# Altium PCB PCB2.PcbDoc
Units mm, origin at the board's own origin, x right, y up, seen from the top; angles counter-clockwise.
Board outline 152.4 x 101.6 mm, 2 copper layers (Top Layer, Bottom Layer); 92 components, 79 nets, 413 pads, 0 vias.
Unrouted connection lines stored in the file: 235.
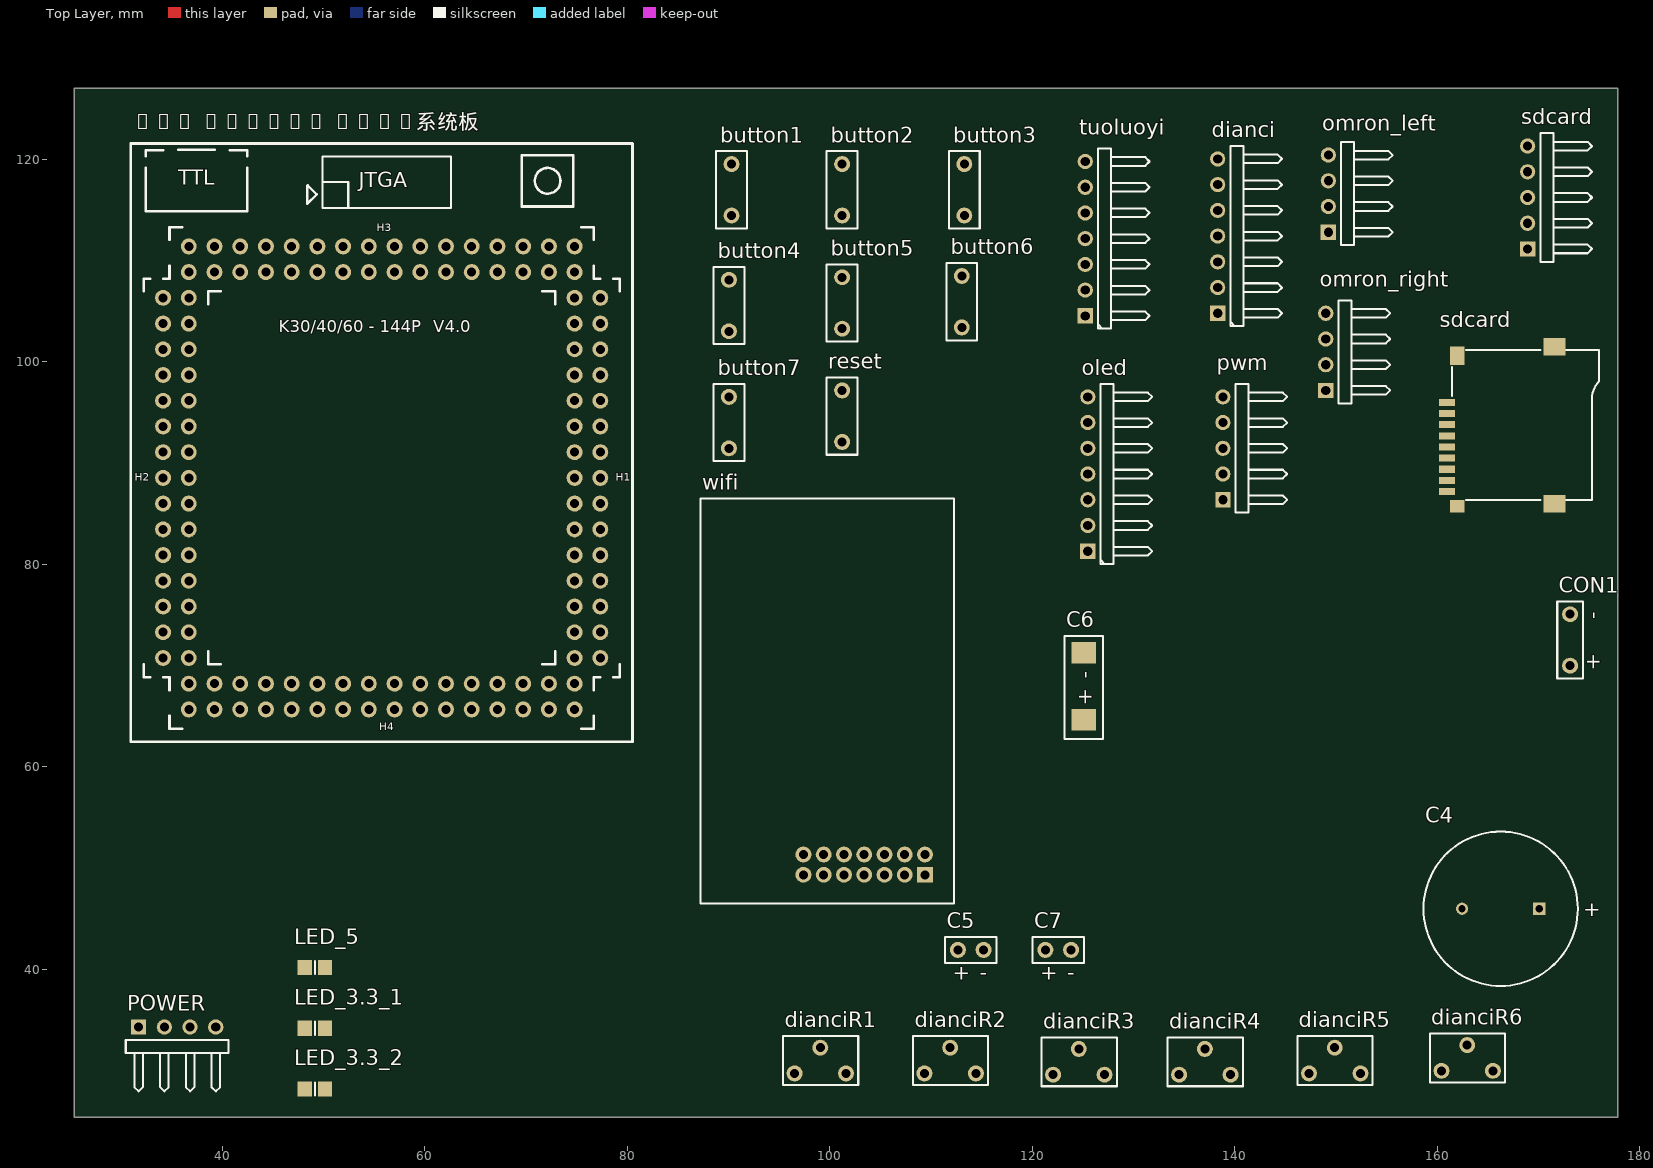
[diagram p0: Top Layer view]
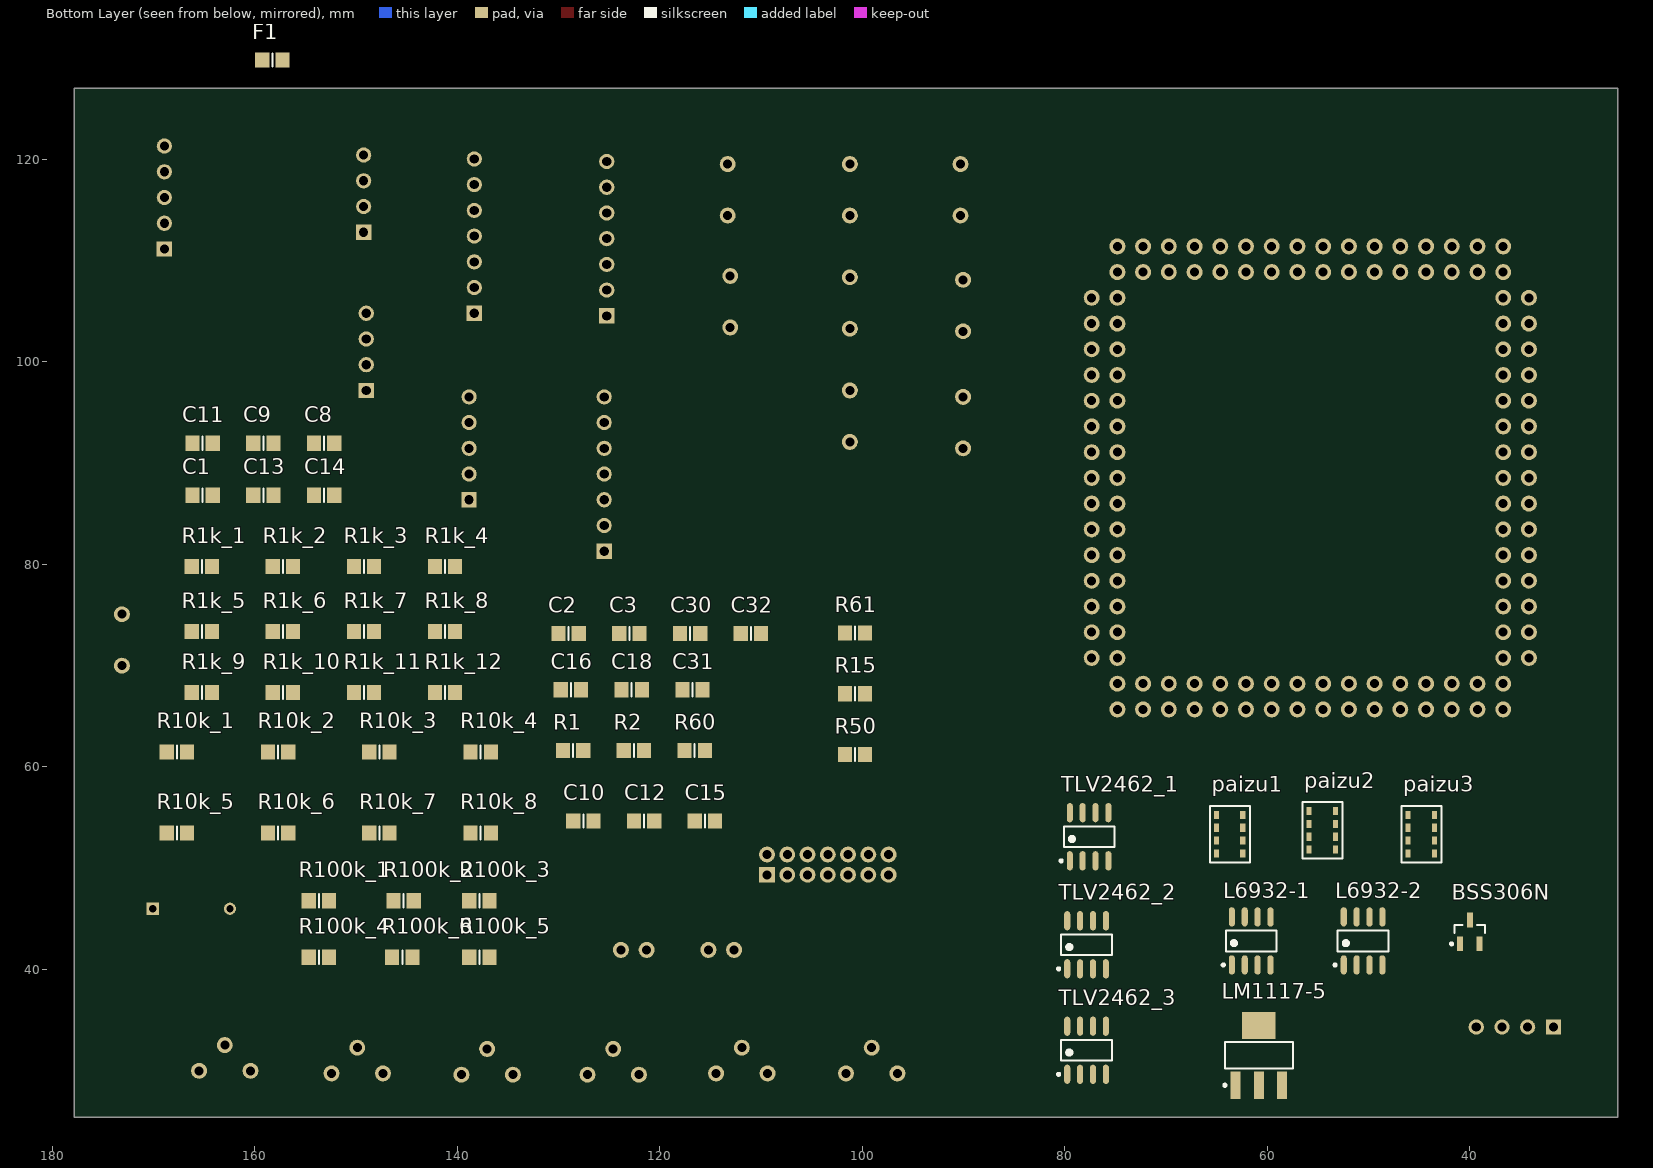
[diagram p1: Bottom Layer view, seen from below]

## Layer stack, top to bottom
Top Layer: signal copper 0.0356
Dielectric: dielectric 0.32, FR-4, Dk 4.8
Bottom Layer: signal copper 0.0356

## Board outline
25.4,25.4 177.8,25.4 177.8,127 25.4,127

## Design rules (kind name [scope] priority, off if disabled: settings)
Clearance [All] p1: gap=0.254
PolygonConnect [All] p1: connectstyle=Relief reliefconductorwidth=0.254 reliefentries=4 polygonreliefangle="90 Angle" airgapwidth=0.254
RoomDefinition control [InComponentClass('control')] p1: confinementstyle=ConfineIn formatcopy=TRUE lockcomponents=FALSE outline 0,0 50.8,0 50.8,25.4 0,25.4
RoutingVias [All] p1: holewidth=0.711 width=1.27 viastyle="Through Hole" minholewidth=0.711 minwidth=1.27 maxholewidth=0.711 maxwidth=1.27
SolderMaskExpansion [All] p1: expansion=0.102
Width [All] p1: maxlimit=0.254 minlimit=0.254 preferedwidth=0.254
28 further rules are at their usual default settings.

## Components (designator, comment, footprint, x,y, rotation, side; value= is the part's Value field where it differs from the comment)
BSS306N "MOSFET-N" SOT-23_M 40.005,43.688 r90 bottom
button1 "SW-PB" BUTTON 90.297,114.427 r90 top
button2 "SW-PB" BUTTON 101.219,114.427 r90 top
button3 "SW-PB" BUTTON 113.284,114.427 r90 top
button4 "SW-PB" BUTTON 90.043,102.997 r90 top
button5 "SW-PB" BUTTON 101.219,103.251 r90 top
button6 "SW-PB" BUTTON 113.03,103.378 r90 top
button7 "SW-PB" BUTTON 90.043,91.44 r90 top
C1 "Cap" 6-0805_M 165.129,86.803 r180 bottom
C2 "Cap" 6-0805_M 128.989,73.152 r180 bottom
C3 "Cap" 6-0805_M 122.989,73.152 r180 bottom
C4 "Cap Pol1" RB7.6-15 166.243,45.974 r0 top
C5 "Cap Pol1" 钽电容_小 112.649,41.91 r0 top
C6 "Cap Pol1" D7343 125.095,64.643 r90 top
C7 "Cap Pol1" 钽电容_小 121.285,41.91 r0 top
C8 "Cap" 6-0805_M 153.129,91.948 r180 bottom
C9 "Cap" 6-0805_M 159.129,91.948 r180 bottom
C10 "Cap" 6-0805_M 127.529,54.639 r180 bottom
C11 "Cap" 6-0805_M 165.129,91.948 r180 bottom
C12 "Cap" 6-0805_M 121.529,54.639 r180 bottom
C13 "Cap" 6-0805_M 159.129,86.803 r180 bottom
C14 "Cap" 6-0805_M 153.129,86.803 r180 bottom
C15 "Cap" 6-0805_M 115.529,54.639 r180 bottom
C16 "Cap" 6-0805_M 128.758,67.593 r180 bottom
C18 "Cap" 6-0805_M 122.758,67.593 r180 bottom
C30 "Cap" 6-0805_M 116.989,73.152 r180 bottom
C31 "Cap" 6-0805_M 116.758,67.593 r180 bottom
C32 "Cap" 6-0805_M 110.989,73.152 r180 bottom
CON1 "PowerIn" 接线端子 173.101,69.977 r90 top
dianci "interface_dianci" HDR1X7H 138.303,104.775 r90 top (schematic designator interface_dianci)
dianciR1 "R4" 滑动变阻器 99.06,32.258 r0 top
dianciR2 "R4" 滑动变阻器 111.887,32.258 r0 top
dianciR3 "R4" 滑动变阻器 124.587,32.131 r0 top
dianciR4 "R4" 滑动变阻器 137.033,32.131 r0 top
dianciR5 "R4" 滑动变阻器 149.86,32.258 r0 top
dianciR6 "R4" 滑动变阻器 162.941,32.512 r0 top
F1 "Fuse 2" 6-0805_M 158.242,129.794 r180 bottom
"K60 144PIN V4.0系统板" "U?" "K60 V4.0最小系统版" 55.753,88.646 r0 top
L6932-1 "L6932" L6932 61.595,42.799 r90 bottom
L6932-2 "L6932" L6932 50.546,42.799 r90 bottom
LED_3.3_1 "LED2" 6-0805_M 49.149,34.178 r0 top
LED_3.3_2 "LED2" 6-0805_M 49.149,28.178 r0 top
LED_5 "LED2" 6-0805_M 49.149,40.178 r0 top
LM1117-5 "LM1117-5" SOT223_M 60.833,31.496 r90 bottom
oled "oled" HDR1X7H 125.476,81.28 r90 top
omron_left "omron_encoder" HDR1X4H 149.225,112.776 r90 top (schematic designator omron_encoder_left)
omron_right "omron_encoder" HDR1X4H 148.971,97.155 r90 top (schematic designator omron_encoder_right)
paizu1 "paizu_1206" paizu 65.024,51.435 r90 bottom
paizu2 "paizu_1206" paizu 55.88,51.816 r90 bottom
paizu3 "paizu_1206" paizu 46.101,51.435 r90 bottom
POWER "power" HDR1X4H 31.75,34.29 r0 top
pwm "pwm" HDR1X5H 138.811,86.36 r90 top
R1 "Res2" 6-0805_M 128.537,61.595 r180 bottom
R1k_1 "Res2" 6-0805_M 165.197,79.756 r180 bottom
R1k_2 "Res2" 6-0805_M 157.197,79.756 r180 bottom
R1k_3 "Res2" 6-0805_M 149.197,79.756 r180 bottom
R1k_4 "Res2" 6-0805_M 141.197,79.756 r180 bottom
R1k_5 "Res2" 6-0805_M 165.197,73.338 r180 bottom
R1k_6 "Res2" 6-0805_M 157.197,73.338 r180 bottom
R1k_7 "Res2" 6-0805_M 149.197,73.338 r180 bottom
R1k_8 "Res2" 6-0805_M 141.197,73.338 r180 bottom
R1k_9 "Res2" 6-0805_M 165.197,67.338 r180 bottom
R1k_10 "Res2" 6-0805_M 157.197,67.338 r180 bottom
R1k_11 "Res2" 6-0805_M 149.197,67.338 r180 bottom
R1k_12 "Res2" 6-0805_M 141.197,67.338 r180 bottom
R2 "Res2" 6-0805_M 122.537,61.595 r180 bottom
R10k_1 "Res2" 6-0805_M 167.669,61.453 r180 bottom
R10k_2 "Res2" 6-0805_M 157.669,61.453 r180 bottom
R10k_3 "Res2" 6-0805_M 147.669,61.453 r180 bottom
R10k_4 "Res2" 6-0805_M 137.669,61.453 r180 bottom
R10k_5 "Res2" 6-0805_M 167.669,53.453 r180 bottom
R10k_6 "Res2" 6-0805_M 157.669,53.453 r180 bottom
R10k_7 "Res2" 6-0805_M 147.669,53.453 r180 bottom
R10k_8 "Res2" 6-0805_M 137.669,53.453 r180 bottom
R15 "Res2" 6-0805_M 100.711,67.204 r180 bottom
R50 "Res2" 6-0805_M 100.711,61.204 r180 bottom
R60 "Res2" 6-0805_M 116.537,61.595 r180 bottom
R61 "Res2" 6-0805_M 100.711,73.204 r180 bottom
R100k_1 "Res2" 6-0805_M 153.656,46.765 r180 bottom
R100k_2 "Res2" 6-0805_M 145.288,46.765 r180 bottom
R100k_3 "Res2" 6-0805_M 137.795,46.765 r180 bottom
R100k_4 "Res2" 6-0805_M 153.656,41.186 r180 bottom
R100k_5 "Res2" 6-0805_M 137.795,41.186 r180 bottom
R100k_6 "Res2" 6-0805_M 145.415,41.186 r180 bottom
reset "SW-PB" BUTTON 101.219,92.075 r90 top (schematic designator S8)
sdcard "interface_sdcard" HDR1X5H 168.91,111.125 r90 top (schematic designator interface_sdcard)
sdcard "sdcard" SDCARD-M 171.958,93.726 r0 top
TLV2462_1 "TLV2462" SOP127P600X175-8L 77.597,53.086 r90 bottom
TLV2462_2 "TLV2462" SOP127P600X175-8L 77.851,42.418 r90 bottom
TLV2462_3 "TLV2462" SOP127P600X175-8L 77.851,32.004 r90 bottom
tuoluoyi "Component_sensor_tuoluoyi" HDR1X7H 125.222,104.521 r90 top (schematic designator sensor_tuoluoyi)
wifi "wifi" wifi 87.249,46.482 r90 top

## Footprints (in the part's own frame and the unit in brackets; to place one, negate y for a bottom-side part, rotate by r counter-clockwise, add the part's x,y. Pads: shape width x height; smd on the part's side, far side on the other; paste and mask are expansions set on the pad)
6-0805_M [mm] "Chip Resistor, Body 2.0x1.2mm, IPC Low Density"
  rect 1.4x1.5 smd: 1(-1,0) 2(1,0)
  silkscreen extent 0,-0.65 0,0.65, body extent -1.07,-0.7 1.07,0.7, height 0.7
BUTTON [mm]
  round 1.575 hole 0.889: 1(0,0) 2(5.08,0)
  silkscreen extent -1.27,-1.52 6.35,1.52
D7343 [mm]
  rect 2.16x2.41 smd: 1(0,0) 2(6.61,0)
  silkscreen extent -1.91,-1.91 8.25,1.91
HDR1X4H [mm] "Connector; Header; 4 Position; Right Angle"
  rect 1.5x1.5 hole 0.9: 1(0,0)
  round 1.5 hole 0.9: 2(2.54,0) 3(5.08,0) 4(7.62,0)
  silkscreen extent -1.27,-6.35 8.89,-1.27
HDR1X5H [mm] "Connector; Header; 5 Position; Right Angle"
  rect 1.5x1.5 hole 0.9: 1(0,0)
  round 1.5 hole 0.9: 2(2.54,0) 3(5.08,0) 4(7.62,0) 5(10.16,0)
  silkscreen extent -1.27,-6.35 11.43,-1.27
HDR1X7H [mm] "Connector; Header; 7 Position; Right Angle"
  rect 1.5x1.5 hole 0.9: 1(0,0)
  round 1.5 hole 0.9: 2(2.54,0) 3(5.08,0) 4(7.62,0) 5(10.16,0) 6(12.7,0) 7(15.24,0)
  silkscreen extent -1.27,-6.35 16.51,-1.27
"K60 V4.0最小系统版" [mil]
  round 62 hole 35: 101(850,-705) 102(750,-705) 103(850,-605) 104(750,-605) 105(850,-505) 106(750,-505) 107(850,-405) 108(750,-405) 109(850,-305) 110(750,-305) 111(850,-205) 112(750,-205) 113(850,-105) 114(750,-105) 115(850,-5) 116(750,-5) 117(850,95) 118(750,95) 119(850,195) 120(750,195) 121(850,295) 122(750,295) 123(850,395) 124(750,395) 125(850,495) 126(750,495) 127(850,595) 128(750,595) 129(850,695) 130(750,695) 201(-750,-705) 202(-850,-705) 203(-750,-605) 204(-850,-605) 205(-750,-505) 206(-850,-505) 207(-750,-405) 208(-850,-405) 209(-750,-305) 210(-850,-305) 211(-750,-205) 212(-850,-205) 213(-750,-105) 214(-850,-105) 215(-750,-5) 216(-850,-5) 217(-750,95) 218(-850,95) 219(-750,195) 220(-850,195) 221(-750,295) 222(-850,295) 223(-750,395) 224(-850,395) 225(-750,495) 226(-850,495) 227(-750,595) 228(-850,595) 229(-750,695) 230(-850,695) 301(750,895) 302(750,795) 303(650,895) 304(650,795) 305(550,895) 306(550,795) 307(450,895) 308(450,795) 309(350,895) 310(350,795) 311(250,895) 312(250,795) 313(150,895) 314(150,795) 315(50,895) 316(50,795) 317(-50,895) 318(-50,795) 319(-150,895) 320(-150,795) 321(-250,895) 322(-250,795) 323(-350,895) 324(-350,795) 325(-450,895) 326(-450,795) 327(-550,895) 328(-550,795) 329(-650,895) 330(-650,795) 331(-750,895) 332(-750,795) 401(750,-805) 402(750,-905) 403(650,-805) 404(650,-905) 405(550,-805) 406(550,-905) 407(450,-805) 408(450,-905) 409(350,-805) 410(350,-905) 411(250,-805) 412(250,-905) 413(150,-805) 414(150,-905) 415(50,-805) 416(50,-905) 417(-50,-805) 418(-50,-905) 419(-150,-805) 420(-150,-905) 421(-250,-805) 422(-250,-905) 423(-350,-805) 424(-350,-905) 425(-450,-805) 426(-450,-905) 427(-550,-805) 428(-550,-905) 429(-650,-805) 430(-650,-905) 431(-750,-805) 432(-750,-905)
  silkscreen extent -975,-1030 975,1295
L6932 [mm] "SOP, 8-Leads, Body 4.90x3.90mm, Pitch 1.27mm, IPC High Density"
  oval 1.9x0.6 smd: 1(-2.375,1.905) 2(-2.375,0.635) 3(-2.375,-0.635) 4(-2.375,-1.905) 5(2.375,-1.905) 6(2.375,-0.635) 7(2.375,0.635) 8(2.375,1.905)
  silkscreen extent -2.5,-2.5 1.03,2.88, body extent -2,-2.5 2,2.5, height 1.75
paizu [mm]
  rect 0.8x0.5 smd: 1(0,0) 2(0,-2.6) 3(1.27,0) 4(1.27,-2.6) 5(2.54,0) 6(2.54,-2.6) 7(3.81,0) 8(3.81,-2.6)
  silkscreen extent -0.89,-3.3 4.7,0.64
RB7.6-15 [mm] "Polarized Capacitor (Radial); 2 Leads"
  rect 1.2x1.2 hole 0.7: 1(3.81,0)
  round 1.2 hole 0.7: 2(-3.81,0)
  silkscreen extent -7.62,-7.62 7.62,7.62
SDCARD-M [mm] "TF卡"
  rect 1.6x0.7 smd: 1(-11.008,2.25) 2(-11.008,1.15) 3(-11.008,0.05) 4(-11.008,-1.05) 5(-11.008,-2.15) 6(-11.008,-3.25) 7(-11.008,-4.35) 8(-11.008,-5.45) 9(-11.008,-6.55)
  rect 1.4x1.2 smd: 10(-10,-8.004)
  rect 2.2x1.7 smd: 11(-0.4,-7.75) 13(-0.4,7.75)
  rect 1.4x1.8 smd: 12(-10,6.85)
  silkscreen extent -10.5,-7.4 4,7.4
SOP127P600X175-8L [mm] "SOP, 8-Leads, Body 4.90x3.90mm, Pitch 1.27mm, IPC High Density"
  oval 1.9x0.6 smd: 1(-2.375,1.905) 2(-2.375,0.635) 3(-2.375,-0.635) 4(-2.375,-1.905) 5(2.375,-1.905) 6(2.375,-0.635) 7(2.375,0.635) 8(2.375,1.905)
  silkscreen extent -2.5,-2.5 1.03,2.88, body extent -2,-2.5 2,2.5, height 1.75
SOT223_M [mm] "SOT223, 4-Leads, Body 6.5x3.5mm, Pitch 2.3mm, Lead Span 7mm, IPC Low Density"
  rect 2.7x1 smd: 1(-2.95,2.3) 2(-2.95,0) 3(-2.95,-2.3)
  rect 2.7x3.3 smd: 4(2.95,0)
  silkscreen extent -3.07,-3.35 1.3,3.48, body extent -1.85,-3.35 1.85,3.35, height 1.7
SOT-23_M [mm] "SOT23, 3-Leads, Body 2.9x1.3mm, Pitch 0.95mm, Lead Span 2.5mm, IPC Low Density"
  rect 1.45x0.6 smd: 1(-1.175,0.95) 2(-1.175,-0.95) 3(1.175,0)
  silkscreen extent -1.3,-1.5 0.7,1.93, body extent -0.7,-1.5 0.7,1.5, height 1.1
wifi [mm]
  rect 1.575x1.575 hole 0.889: 1(2.85,-22.15)
  round 1.575 hole 0.889: 2(4.85,-22.15) 3(2.85,-20.15) 4(4.85,-20.15) 5(2.85,-18.15) 6(4.85,-18.15) 7(2.85,-16.15) 8(4.85,-16.15) 9(2.85,-14.15) 10(4.85,-14.15) 11(2.85,-12.15) 12(4.85,-12.15) 13(2.85,-10.15) 14(4.85,-10.15)
  silkscreen extent 0,-25 40,0
接线端子 [mm]
  round 1.575 hole 0.889: 1(5.08,0) 2(0,0)
  silkscreen extent -1.27,-1.27 6.35,1.27
滑动变阻器 [mm]
  round 1.575 hole 0.889: 1(2.54,-2.54) 2(-2.54,-2.54) 3(0,0)
  silkscreen extent -3.68,-3.68 3.75,1.14
钽电容_小 [mil]
  round 62 hole 35: 1(0,0) 2(100,0)
  silkscreen extent -50,-50 150,50

## Part data
BSS306N: "N-Channel MOSFET"
button1 button2 button3 button4 button5 button6 button7 reset: "Switch"
C1 C2 C3 C8 C9 C10 C11 C12 C13 C14 C15 C16 C18 C30 C31 C32: "Capacitor"
C4 C5 C6 C7: "Polarized Capacitor (Radial)"
CON1: library part "Header 2", "Header, 2-Pin"
dianciR1 dianciR2 dianciR3 dianciR4 dianciR5 dianciR6: library part RPot, "Potentiometer"
F1: "Fuse"
"K60 144PIN V4.0系统板": library part "K60 144PIN V4.0系统板"
LED_3.3_1 LED_3.3_2 LED_5: "Typical RED, GREEN, YELLOW, AMBER GaAs LED"
R1 R1k_1 R1k_2 R1k_3 R1k_4 R1k_5 R1k_6 R1k_7 R1k_8 R1k_9 R1k_10 R1k_11 R1k_12 R2 R10k_1 R10k_2 R10k_3 R10k_4 R10k_5 R10k_6 R10k_7 R10k_8 R15 R50 R60 R61 R100k_1 R100k_2 R100k_3 R100k_4 R100k_5 R100k_6: "Resistor"

## Nets (pads, with @x,y where several pads share a name; then routed paths per layer and width w, separated by ;. In a path a pad name is that pad's centre, name@x,y a point inside that pad or via, vN(x,y) a via of type N, cw(c..) or ccw(c..) an arc to the next point about the centre after c; other vN are vias at no path point)
3.3V: C2.2 C3.2 C18.2 C30.2 C31.2 C32.2 L6932-1.4 L6932-2.4 LED_3.3_1.1 LED_3.3_2.1 oled.2 paizu1.2 paizu1.4 paizu1.6 paizu1.8 POWER.3 R15.2 R50.2 R61.2 sdcard.4@160.95,92.676 TLV2462_1.8 TLV2462_2.8 TLV2462_3.8 tuoluoyi.3 wifi.2
5V: "K60 144PIN V4.0系统板.432" F1.2 LED_5.1 omron_left.2 omron_right.2 paizu3.2 paizu3.4 paizu3.6 paizu3.8 POWER.4
AR1: "K60 144PIN V4.0系统板.307" tuoluoyi.2
AR2: "K60 144PIN V4.0系统板.108" tuoluoyi.1
BUTTON1: "K60 144PIN V4.0系统板.422" button1.1
BUTTON2: "K60 144PIN V4.0系统板.419" button2.1
BUTTON3: "K60 144PIN V4.0系统板.420" button3.1
BUTTON4: "K60 144PIN V4.0系统板.417" button4.1
BUTTON5: "K60 144PIN V4.0系统板.418" button5.1
BUTTON6: "K60 144PIN V4.0系统板.415" button6.1
BUTTON7: "K60 144PIN V4.0系统板.416" button7.1
FTM1_QDPHA: "K60 144PIN V4.0系统板.324" omron_right.3 paizu3.1
FTM1_QDPHB: "K60 144PIN V4.0系统板.325" omron_right.4 paizu3.3
FTM2_QDPHA: "K60 144PIN V4.0系统板.322" omron_left.3 paizu3.5
FTM2_QDPHB: "K60 144PIN V4.0系统板.323" omron_left.4 paizu3.7
GND: "K60 144PIN V4.0系统板.331" "K60 144PIN V4.0系统板.332" "K60 144PIN V4.0系统板.401" BSS306N.1 BSS306N.3 button1.2 button2.2 button3.2 button4.2 button5.2 button6.2 button7.2 C1.1 C3.1 C4.2 C5.1 C6.1 C7.1 C8.1 C9.1 C10.2 C11.1 C12.2 C13.1 C14.1 C15.2 C16.1 C18.1 C31.1 C32.1 CON1.1 dianci.1 L6932-1.5 L6932-1.6 L6932-1.7 L6932-1.8 L6932-2.5 L6932-2.6 L6932-2.7 L6932-2.8 LM1117-5.1 oled.1 omron_left.1 omron_right.1 paizu2.2 paizu2.4 paizu2.6 paizu2.8 POWER.1 POWER.2 pwm.1 R1.1 R1k_2.1 R1k_4.1 R1k_6.1 R1k_8.1 R1k_10.1 R1k_12.1 R2.1 R10k_7.1 R10k_8.1 R60.1 reset.1 sdcard.1@168.91,111.125 sdcard.6 sdcard.10 sdcard.11 sdcard.12 sdcard.13 TLV2462_1.4 TLV2462_2.4 TLV2462_3.4 tuoluoyi.4 wifi.1
NetBSS306N_2: BSS306N.2 C4.1 C5.2 C16.2 CON1.2 L6932-1.1 L6932-1.2 L6932-2.1 L6932-2.2 LM1117-5.3
NetC2_1: C2.1 L6932-1.3 R10k_7.2 R15.1
NetC6_1: C6.2 C7.2 F1.1 LM1117-5.2
NetC30_1: C30.1 L6932-2.3 R10k_8.2 R61.1
NetdianciR1_1: dianciR1.1 dianciR1.3 R10k_1.1 TLV2462_1.1
NetdianciR1_2: dianciR1.2 R100k_1.2
NetdianciR2_1: dianciR2.1 dianciR2.3 R10k_3.1 TLV2462_1.7
NetdianciR2_2: dianciR2.2 R100k_3.2
NetdianciR3_1: dianciR3.1 dianciR3.3 R10k_5.1 TLV2462_2.1
NetdianciR3_2: dianciR3.2 R100k_6.2
NetdianciR4_1: dianciR4.1 dianciR4.3 R10k_2.1 TLV2462_2.7
NetdianciR4_2: dianciR4.2 R100k_2.2
NetdianciR5_1: dianciR5.1 dianciR5.3 R10k_4.1 TLV2462_3.1
NetdianciR5_2: dianciR5.2 R100k_4.2
NetdianciR6_1: dianciR6.1 dianciR6.3 R10k_6.1 TLV2462_3.7
NetdianciR6_2: dianciR6.2 R100k_5.2
NetLED_3.3_1_2: LED_3.3_1.2 R60.2
NetLED_3.3_2_2: LED_3.3_2.2 R1.2
NetLED_5_2: LED_5.2 R2.2
NetR1k_1_2: R1k_1.2 TLV2462_1.3
NetR1k_2_2: R1k_2.2 R100k_1.1 TLV2462_1.2
NetR1k_3_2: R1k_3.2 TLV2462_2.5
NetR1k_4_2: R1k_4.2 R100k_2.1 TLV2462_2.6
NetR1k_5_2: R1k_5.2 TLV2462_1.5
NetR1k_6_2: R1k_6.2 R100k_3.1 TLV2462_1.6
NetR1k_7_2: R1k_7.2 TLV2462_3.3
NetR1k_8_2: R1k_8.2 R100k_4.1 TLV2462_3.2
NetR1k_9_2: R1k_9.2 TLV2462_2.3
NetR1k_10_2: R1k_10.2 R100k_6.1 TLV2462_2.2
NetR1k_11_2: R1k_11.2 TLV2462_3.5
NetR1k_12_2: R1k_12.2 R100k_5.1 TLV2462_3.6
NetR50_1: R50.1 reset.2 wifi.7
OLED_CS: "K60 144PIN V4.0系统板.425" oled.7
OLED_D0: "K60 144PIN V4.0系统板.429" oled.3
OLED_D1: "K60 144PIN V4.0系统板.430" oled.4
OLED_DS: "K60 144PIN V4.0系统板.428" oled.6
OLED_RST: "K60 144PIN V4.0系统板.427" oled.5
PWM_LEFT1: "K60 144PIN V4.0系统板.204" paizu2.1 pwm.5
PWM_LEFT2: "K60 144PIN V4.0系统板.201" paizu2.3 pwm.4
PWM_RIGHT1: "K60 144PIN V4.0系统板.409" paizu2.5 pwm.3
PWM_RIGHT2: "K60 144PIN V4.0系统板.410" paizu2.7 pwm.2
SDCARD_CLK: "K60 144PIN V4.0系统板.423" paizu1.3 sdcard.3@168.91,116.205 sdcard.5@160.95,91.576
SDCARD_CS: "K60 144PIN V4.0系统板.426" paizu1.1 sdcard.2
SDCARD_MISO: "K60 144PIN V4.0系统板.421" paizu1.7 sdcard.5@168.91,121.285 sdcard.7
SDCARD_MOSI: "K60 144PIN V4.0系统板.424" paizu1.5 sdcard.3@160.95,93.776 sdcard.4@168.91,118.745
SIGNAL_IN_L1: dianci.2 R1k_1.1
SIGNAL_IN_L2: dianci.3 R1k_5.1
SIGNAL_IN_L3: dianci.4 R1k_9.1
SIGNAL_IN_L4: dianci.5 R1k_3.1
SIGNAL_IN_L5: dianci.6 R1k_7.1
SIGNAL_IN_L6: dianci.7 R1k_11.1
SIGNAL_OUT_L1: "K60 144PIN V4.0系统板.224" C11.2 R10k_1.2
SIGNAL_OUT_L2: "K60 144PIN V4.0系统板.219" C8.2 R10k_3.2
SIGNAL_OUT_L3: "K60 144PIN V4.0系统板.220" C14.2 R10k_5.2
SIGNAL_OUT_L4: "K60 144PIN V4.0系统板.217" C13.2 R10k_2.2
SIGNAL_OUT_L5: "K60 144PIN V4.0系统板.218" C9.2 R10k_4.2
SIGNAL_OUT_L6: "K60 144PIN V4.0系统板.213" C1.2 R10k_6.2
UART_RX: "K60 144PIN V4.0系统板.327" wifi.3
UART_T'X: wifi.4
UART_TX: "K60 144PIN V4.0系统板.326"
XOUT: "K60 144PIN V4.0系统板.105" tuoluoyi.7
YOUT: "K60 144PIN V4.0系统板.106" tuoluoyi.6
ZOUT: "K60 144PIN V4.0系统板.107" tuoluoyi.5
pads on no net: "K60 144PIN V4.0系统板.101" "K60 144PIN V4.0系统板.102" "K60 144PIN V4.0系统板.103" "K60 144PIN V4.0系统板.104" "K60 144PIN V4.0系统板.109" "K60 144PIN V4.0系统板.110" "K60 144PIN V4.0系统板.111" "K60 144PIN V4.0系统板.112" "K60 144PIN V4.0系统板.113" "K60 144PIN V4.0系统板.114" "K60 144PIN V4.0系统板.115" "K60 144PIN V4.0系统板.116" "K60 144PIN V4.0系统板.117" "K60 144PIN V4.0系统板.118" "K60 144PIN V4.0系统板.119" "K60 144PIN V4.0系统板.120" "K60 144PIN V4.0系统板.121" "K60 144PIN V4.0系统板.122" "K60 144PIN V4.0系统板.123" "K60 144PIN V4.0系统板.124" "K60 144PIN V4.0系统板.125" "K60 144PIN V4.0系统板.126" "K60 144PIN V4.0系统板.127" "K60 144PIN V4.0系统板.128" "K60 144PIN V4.0系统板.129" "K60 144PIN V4.0系统板.130" "K60 144PIN V4.0系统板.202" "K60 144PIN V4.0系统板.203" "K60 144PIN V4.0系统板.205" "K60 144PIN V4.0系统板.206" "K60 144PIN V4.0系统板.207" "K60 144PIN V4.0系统板.208" "K60 144PIN V4.0系统板.209" "K60 144PIN V4.0系统板.210" "K60 144PIN V4.0系统板.211" "K60 144PIN V4.0系统板.212" "K60 144PIN V4.0系统板.214" "K60 144PIN V4.0系统板.215" "K60 144PIN V4.0系统板.216" "K60 144PIN V4.0系统板.221" "K60 144PIN V4.0系统板.222" "K60 144PIN V4.0系统板.223" "K60 144PIN V4.0系统板.225" "K60 144PIN V4.0系统板.226" "K60 144PIN V4.0系统板.227" "K60 144PIN V4.0系统板.228" "K60 144PIN V4.0系统板.229" "K60 144PIN V4.0系统板.230" "K60 144PIN V4.0系统板.301" "K60 144PIN V4.0系统板.302" "K60 144PIN V4.0系统板.303" "K60 144PIN V4.0系统板.304" "K60 144PIN V4.0系统板.305" "K60 144PIN V4.0系统板.306" "K60 144PIN V4.0系统板.308" "K60 144PIN V4.0系统板.309" "K60 144PIN V4.0系统板.310" "K60 144PIN V4.0系统板.311" "K60 144PIN V4.0系统板.312" "K60 144PIN V4.0系统板.313" "K60 144PIN V4.0系统板.314" "K60 144PIN V4.0系统板.315" "K60 144PIN V4.0系统板.316" "K60 144PIN V4.0系统板.317" "K60 144PIN V4.0系统板.318" "K60 144PIN V4.0系统板.319" "K60 144PIN V4.0系统板.320" "K60 144PIN V4.0系统板.321" "K60 144PIN V4.0系统板.328" "K60 144PIN V4.0系统板.329" "K60 144PIN V4.0系统板.330" "K60 144PIN V4.0系统板.402" "K60 144PIN V4.0系统板.403" "K60 144PIN V4.0系统板.404" "K60 144PIN V4.0系统板.405" "K60 144PIN V4.0系统板.406" "K60 144PIN V4.0系统板.407" "K60 144PIN V4.0系统板.408" "K60 144PIN V4.0系统板.411" "K60 144PIN V4.0系统板.412" "K60 144PIN V4.0系统板.413" "K60 144PIN V4.0系统板.414" "K60 144PIN V4.0系统板.431" C10.1 C12.1 C15.1 LM1117-5.4 sdcard.1@160.95,95.976 sdcard.8 sdcard.9 wifi.5 wifi.6 wifi.8 wifi.9 wifi.10 wifi.11 wifi.12 wifi.13 wifi.14

## Text inside footprints (layer, text, board x,y; h text height)
C4: Top Overlay "+" at 174.375,45.237 h1.5
C5: Top Overlay "-" at 114.808,38.989 h1.52; Top Overlay "+" at 112.141,38.989 h1.52
C6: Top Overlay "-" at 125.857,68.707 h1.52 r90; Top Overlay "+" at 125.857,66.04 h1.52 r90
C7: Top Overlay "-" at 123.444,38.989 h1.52; Top Overlay "+" at 120.777,38.989 h1.52
CON1: Top Overlay "+" at 176.022,69.469 h1.52 r90; Top Overlay "-" at 176.022,74.549 h1.52 r90
"K60 144PIN V4.0系统板": Top Overlay "K30/40/60 - 144P" at 45.593,102.489 h2.03; Top Overlay "JTGA" at 53.467,116.713 h2.54; Top Overlay "H1" at 78.867,88.011 h1.27; Top Overlay "H4" at 55.499,63.373 h1.27; Top Overlay "H2" at 31.369,88.011 h1.27; Top Overlay "H3" at 55.245,112.649 h1.27; Top Overlay "TTL" at 35.687,116.967 h2.54; Top Overlay "V4.0" at 60.833,102.489 h2.03